# Altium PCB MSOP-16_L4.0-W3.0-P0.50-LS4.9-BL_2020-12-23_20-21-20.pcbdoc
Units mm, origin at the board's own origin, x right, y up, seen from the top; angles counter-clockwise.
Board outline 33.97 x 31.25 mm, 2 copper layers (Top Layer, Bottom Layer); 1 components, 0 nets, 16 pads, 0 vias.
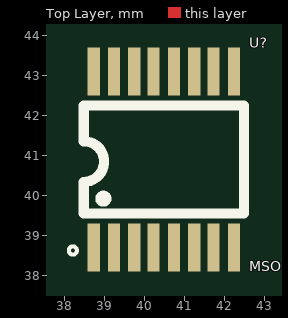
[diagram p0: Top Layer view]
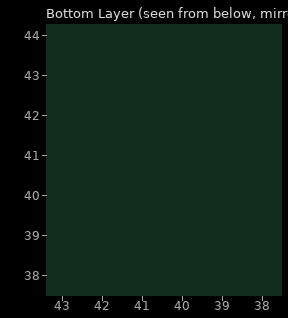
[diagram p1: Bottom Layer view, seen from below]

## Layer stack, top to bottom
Top Layer: signal copper (thickness not stored)
Dielectric: dielectric 0.32, FR-4, Dk 4.8
Bottom Layer: signal copper (thickness not stored)

## Board outline
59.372,25.4 25.4,25.4 25.4,56.648 59.372,56.648

## Components (designator, comment, footprint, x,y, rotation, side; value= is the part's Value field where it differs from the comment)
U? "MSOP-16_L4.0-W3.0-P0.50-LS4.9-BL" MSOP-16_L4.0-W3.0-P0.50-LS4.9-BL 40.354,40.897 r0 top

## Footprints (in the part's own frame and the unit in brackets; to place one, negate y for a bottom-side part, rotate by r counter-clockwise, add the part's x,y. Pads: shape width x height; smd on the part's side, far side on the other; paste and mask are expansions set on the pad)
MSOP-16_L4.0-W3.0-P0.50-LS4.9-BL [mil]
  rect 12x47.24 smd: 1(-64.25,-86.5) 2(-44.25,-86.5) 3(-24.25,-86.5) 4(-5.25,-86.5) 5(14.75,-86.5) 6(34.75,-86.5) 7(53.75,-86.5) 8(73.75,-86.5) 9(73.75,86.5) 10(53.75,86.5) 11(34.75,86.5) 12(14.75,86.5) 13(-5.25,86.5) 14(-24.25,86.5) 15(-44.25,86.5) 16(-64.25,86.5)
  silkscreen extent -89,-93 84,53

## Nets (pads, with @x,y where several pads share a name; then routed paths per layer and width w, separated by ;. In a path a pad name is that pad's centre, name@x,y a point inside that pad or via, vN(x,y) a via of type N, cw(c..) or ccw(c..) an arc to the next point about the centre after c; other vN are vias at no path point)
pads on no net: U?.1 U?.2 U?.3 U?.4 U?.5 U?.6 U?.7 U?.8 U?.9 U?.10 U?.11 U?.12 U?.13 U?.14 U?.15 U?.16

## Silkscreen, mask and mechanical layers (free items; w line width, h text height)
Document:
  lines w0.003: 42.361,40.999 42.412,41.049